# EAGLE board driver (EAGLE 9.6.2)
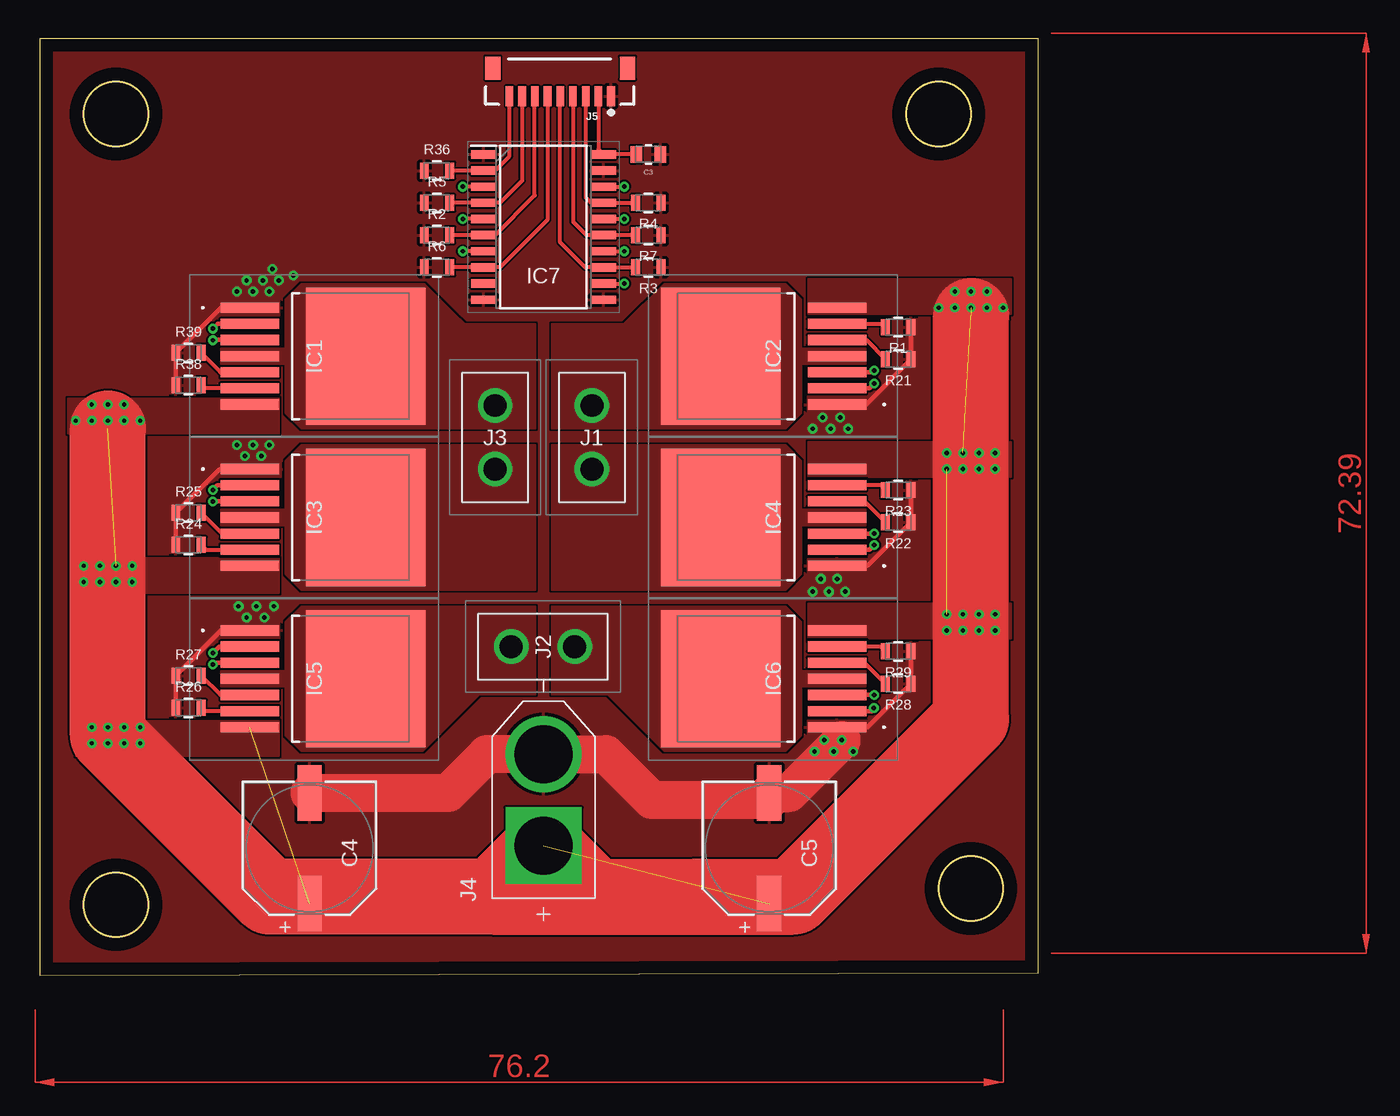
[diagram p0: board, top side]
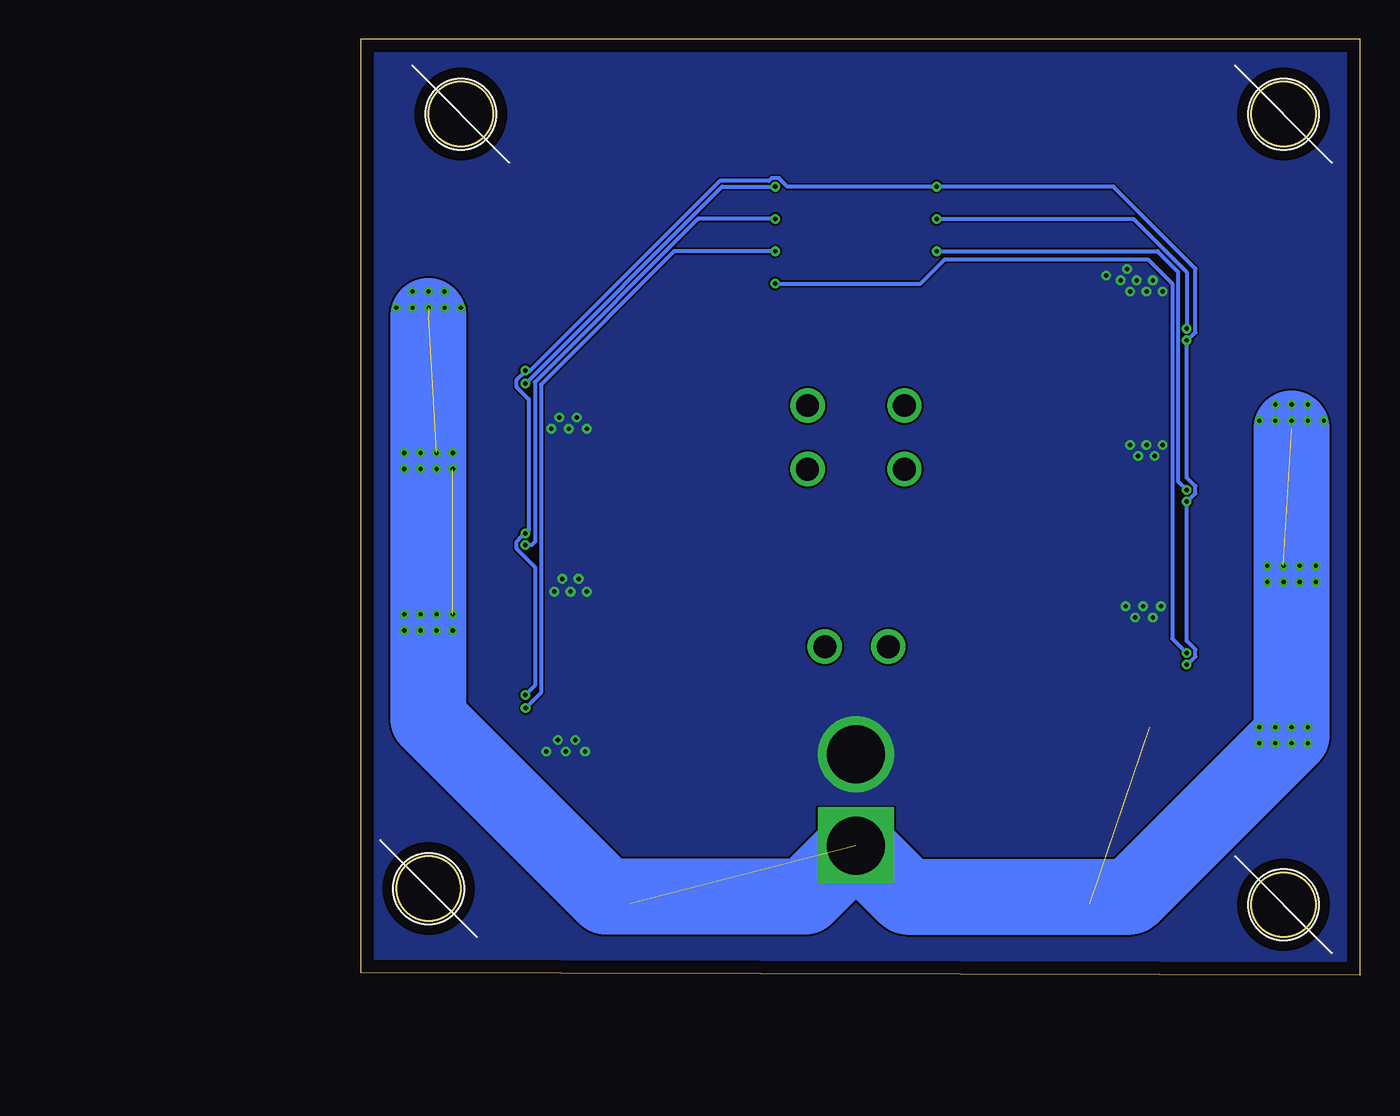
[diagram p1: board, bottom side, seen from below]

Size 78.64 x 73.7 mm. Coordinates in mm from the lower left corner, seen from the top.
Outline: 0,0 78.64,0.2 78.64,73.7 0,73.7 0,0
Outline: circle at 6.01,67.77 radius 2.54
Outline: circle at 70.79,67.77 radius 2.54
Outline: circle at 73.33,6.8 radius 2.54
Outline: circle at 6.01,5.54 radius 2.54
Copper layers (1*16): Top 0.035mm / dielectric 1.5mm / Bottom 0.035mm
Design rules "default": minimum track width 6mil, minimum drill 0.35mm, track to track 6mil, track to pad 6mil, pad to pad 6mil, via to via 6mil, smd to smd 6mil, copper to edge 40mil, drill to drill 6mil, minimum pad ring 10mil, minimum via ring 8mil, stop-mask expansion 4mil, vias tented up to drill 0mil, thermal gap 10mil

## Footprints (pad centres in the part's own frame; a part is rotated, then mirrored left to right if it is on the bottom)
WCAP-CSST_0805 = smd 0.9 x 1.3: 1 -0.95,0; 2 0.95,0
WCAP-AS5H_10X10.5(DXL) = smd 4.4 x 1.9: 1 4.35,0; 2 -4.35,0
BTS7960B = smd 0.8 x 4.6: 1 -3.81,-9.15; 2 -2.54,-9.15; 3 -1.27,-9.15; 4 0,-9.15; 5 1.27,-9.15; 6 2.54,-9.15; 7 3.81,-9.15 | smd 10.8 x 9.4: 8 0,0
SOIC127P1030X265-20N = smd 1.95 x 0.65: 1 -4.725,5.715; 2 -4.725,4.445; 3 -4.725,3.175; 4 -4.725,1.905; 5 -4.725,0.635; 6 -4.725,-0.635; 7 -4.725,-1.905; 8 -4.725,-3.175; 9 -4.725,-4.445; 10 -4.725,-5.715; 11 4.725,-5.715; 12 4.725,-4.445; 13 4.725,-3.175; 14 4.725,-1.905; 15 4.725,-0.635; 16 4.725,0.635; 17 4.725,1.905; 18 4.725,3.175; 19 4.725,4.445; 20 4.725,5.715
XT30PB = drill 1.8 pad 2.7: 1 0,0; 2 0,-5
AMASS_XT60-M = drill 4.55 pad 6: N 3.6,0 | drill 4.55 pad 6 square: P -3.6,0
JST-6-SMD-VERT-1.0MM = smd 0.6 x 1.55: 1 -3.54,1.27; 2 -2.54,1.27; 3 -1.54,1.27; 4 -0.54,1.27; 5 0.46,1.27; 6 1.46,1.27; 7 2.46,1.27; 8 3.46,1.27; 9 4.46,1.27 | smd 1.2 x 1.8: P$1 -4.84,-0.955; P$2 5.76,-0.955
WRIS-KSKE_0805_2.0X1.25X0.6(LXWXH) = smd 0.7 x 1.25: 1 -1,0; 2 1,0

## Placement (x,y rotation side)
C3  100nF  [WCAP-CSST_0805]  47.92,64.59 180 top
C4  330 µF  [WCAP-AS5H_10X10.5(DXL)]  21.25,9.98 270 top
C5  330 µF  [WCAP-AS5H_10X10.5(DXL)]  57.45,9.98 270 top
IC1  BTS7960B  [BTS7960B]  25.7,48.72 270 top
IC2  BTS7960B  [BTS7960B]  53.64,48.72 90 top
IC3  BTS7960B  [BTS7960B]  25.7,36.02 270 top
IC4  BTS7960B  [BTS7960B]  53.64,36.02 90 top
IC5  BTS7960B  [BTS7960B]  25.7,23.32 270 top
IC6  BTS7960B  [BTS7960B]  53.64,23.32 90 top
IC7  SN74AHC244DW  [SOIC127P1030X265-20N]  39.67,58.88 0 top
J1  XT30PB  [XT30PB]  43.48,39.83 180 top
J2  XT30PB  [XT30PB]  37.13,25.86 90 top
J3  XT30PB  [XT30PB]  35.86,39.83 180 top
J4  XT60-M  [AMASS_XT60-M]  39.67,13.79 90 top
J5  JST_6_PIN_VERTICAL  [JST-6-SMD-VERT-1.0MM]  41.45,70.43 180 top
R1  10k  [WRIS-KSKE_0805_2.0X1.25X0.6(LXWXH)]  67.61,51 180 top
R2  10k  [WRIS-KSKE_0805_2.0X1.25X0.6(LXWXH)]  31.29,58.24 0 top
R3  10k  [WRIS-KSKE_0805_2.0X1.25X0.6(LXWXH)]  47.92,55.7 180 top
R4  10k  [WRIS-KSKE_0805_2.0X1.25X0.6(LXWXH)]  47.92,60.78 180 top
R5  10k  [WRIS-KSKE_0805_2.0X1.25X0.6(LXWXH)]  31.29,60.78 0 top
R6  10k  [WRIS-KSKE_0805_2.0X1.25X0.6(LXWXH)]  31.29,55.7 0 top
R7  10k  [WRIS-KSKE_0805_2.0X1.25X0.6(LXWXH)]  47.92,58.24 180 top
R21  10k  [WRIS-KSKE_0805_2.0X1.25X0.6(LXWXH)]  67.61,48.46 180 top
R22  10k  [WRIS-KSKE_0805_2.0X1.25X0.6(LXWXH)]  67.61,35.63 180 top
R23  10k  [WRIS-KSKE_0805_2.0X1.25X0.6(LXWXH)]  67.61,38.17 180 top
R24  10k  [WRIS-KSKE_0805_2.0X1.25X0.6(LXWXH)]  11.73,33.86 0 top
R25  10k  [WRIS-KSKE_0805_2.0X1.25X0.6(LXWXH)]  11.73,36.4 0 top
R26  10k  [WRIS-KSKE_0805_2.0X1.25X0.6(LXWXH)]  11.73,21.03 0 top
R27  10k  [WRIS-KSKE_0805_2.0X1.25X0.6(LXWXH)]  11.73,23.57 0 top
R28  10k  [WRIS-KSKE_0805_2.0X1.25X0.6(LXWXH)]  67.61,22.93 180 top
R29  10k  [WRIS-KSKE_0805_2.0X1.25X0.6(LXWXH)]  67.61,25.47 180 top
R36  10k  [WRIS-KSKE_0805_2.0X1.25X0.6(LXWXH)]  31.29,63.32 0 top
R38  10k  [WRIS-KSKE_0805_2.0X1.25X0.6(LXWXH)]  11.73,46.43 0 top
R39  10k  [WRIS-KSKE_0805_2.0X1.25X0.6(LXWXH)]  11.73,48.97 0 top

## Library data of the parts
C3 = Wurth_Capacitors_WCAP-CSST; CERAMIC-TYPE: X7R Class II; DATASHEET-URL: https://www.we-online.com/catalog/datasheet/885382207007.pdf; DF: 2.50%; H: 1.25mm; OPERATING-TEMPERATURE: -55 / +125°C; PART-NUMBER: 885382207007; RISO: 5GOhm; TECHNICAL-REFERENCE: X7R0805104K050DFCT1S000; TOL-C: +/- 10%; VR: 50V(DC)
C4 C5 = Wurth_Capacitors_WCAP-AS5H; DATASHEET-URL: https://www.we-online.com/catalog/datasheet/865230457008.pdf; DF: 16%; DIAMETER: 10mm; I-LEAK: 82.5uA; I-RIPPLE: 375mA; L: 10.5mm; OPERATING-TEMPERATURE: -40 °C up to +105 °C; PART-NUMBER: 865230457008; TECHNICAL-REFERENCE: ASDF105331M025DVCTEE000; VR: 25V(DC); Z: 0.0956527Ohm
IC1-IC6 = BTS7960B; DESCRIPTION: Path resistance of typ. 16 m @ 25 C; HEIGHT: 4.4mm; MANUFACTURER_NAME: Rochester Electronics; MANUFACTURER_PART_NUMBER: BTS7960B
IC7 = SN74AHC244DW; ARROW_PART_NUMBER: SN74AHC244DW; ARROW_PRICE-STOCK: https://www.arrow.com/en/products/sn74ahc244dw/texas-instruments?region=nac; DESCRIPTION: SN74AHC244DW, Octal Bus Buffer, AHC, 11.9 @ 3.3 Vns, 8mA 2 to 5.5V 20-Pin SOIC; HEIGHT: 2.65mm; MANUFACTURER_NAME: Texas Instruments; MANUFACTURER_PART_NUMBER: SN74AHC244DW; MOUSER_PART_NUMBER: 595-SN74AHC244DW; MOUSER_PRICE-STOCK: https://www.mouser.co.uk/ProductDetail/Texas-Instruments/SN74AHC244DW?qs=j%2FZo4ajzVJKtLyxm%252BX3lew%3D%3D
J1-J3 = XT30PB; DESCRIPTION: Mini XT60 XT30 Connector for RC Multirotor Racing Drone Quadcopter; HEIGHT: 10.7mm; MANUFACTURER_NAME: Amass; MANUFACTURER_PART_NUMBER: XT30PB
J4 = XT60-M; AVAILABILITY: Not in stock; DESCRIPTION: Plug; DC supply; XT60; male; PIN: 2; for cable; soldered; 30A; 500V; MF: AMASS; MP: XT60-M; PACKAGE: Package; PRICE: None
J5 = SparkFun-Connectors_JST_SH; PROD_ID: CONN-08249; SF_ID: GPS-00579
R1-R7 R21-R29 R36 R38 R39 = Wurth_Resistor_WRIS-KSKE; DATASHEET-URL: https://katalog.we-online.de/pbs/datasheet/560050320001.pdf; IR: 1.81A; MOUNT: SMT; PART-NUMBER: 560050320001; PRATED: 0.33W; TCR: 250ppm/ °C; TECHNICAL-REFERENCE: KE0805R100F103LAATP0000

## Nets
GND: C3.1 C4.2 C5.2 IC1.1 IC2.1 IC3.1 IC4.1 IC5.1 IC6.1 IC7.1 IC7.10 IC7.11 IC7.19 J4.N J5.1 R1.1 R2.1 R3.1 R4.1 R5.1 R6.1 R7.1 R21.1 R22.1 R23.1 R24.1 R25.1 R26.1 R27.1 R28.1 R29.1 R36.1 R38.1 R39.1
I1: IC7.2 J5.9 R36.2
I2: IC7.4 J5.8 R5.2
I3: IC7.6 J5.7 R2.2
I4: IC7.8 J5.6 R6.2
I5: IC7.13 J5.5 R3.2
I6: IC7.15 J5.4 R7.2
IEN: IC7.17 J5.3 R4.2
N$1: IC2.6 R1.2
N$2: IC1.6 R38.2
N$3: IC1.5 R39.2
N$4: IC2.5 R21.2
N$5: IC3.6 R24.2
N$6: IC3.5 R25.2
N$7: IC4.6 R23.2
N$8: IC4.5 R22.2
N$9: IC5.6 R26.2
N$10: IC5.5 R27.2
N$11: IC6.6 R29.2
N$12: IC6.5 R28.2
OUT1: IC2.4 IC2.8 J1.2
OUT2: IC4.4 IC4.8 J1.1
OUT3: IC6.4 IC6.8 J2.2
OUT4: IC5.4 IC5.8 J2.1
OUT5: IC3.4 IC3.8 J3.1
OUT6: IC1.4 IC1.8 J3.2
S1: IC2.2 IC7.18
S2: IC4.2 IC7.16
S3: IC6.2 IC7.14
S4: IC5.2 IC7.12
S5: IC3.2 IC7.7
S6: IC1.2 IC7.5
SEN: IC1.3 IC2.3 IC3.3 IC4.3 IC5.3 IC6.3 IC7.3
VCC: C3.2 IC7.20 J5.2
VS: C4.1 C5.1 IC1.7 IC2.7 IC3.7 IC4.7 IC5.7 IC6.7 J4.P

## Tracks (layer width: path | path; a pad name or v marks a point on that pad's centre or on a via)
GND  (via drill 0.35)
  Top 0.305: IC4.1 63.16,32.2
  Top 0.35: R23.1 R22.1 65.18,32.2 63.16,32.2 | R29.1 R28.1 65.18,19.5 IC6.1 | R24.1 R25.1 14.16,39.83 IC3.1 | IC1.1 14.29,52.53 R39.1 R38.1 | R26.1 R27.1 14.29,27.13 IC5.1 16.81,27.13 | R1.1 R21.1 65.05,44.91 IC2.1
  Top 3: C4.2 32.16,14.33 35.22,17.39 J4.N 44.59,17.39 48.19,13.79 57.45,13.79 | C5.2 59.01,14.33 v63.16,18.49
  other vias: 19.98,55.06 18.33,55.57 18.84,54.68 18.08,53.8 17.57,54.68 16.81,53.8 16.3,54.68 15.54,53.8 15.54,41.73 16.81,41.73 16.17,40.84 17.45,40.84 18.08,41.73 15.67,29.03 16.3,28.14 17.06,29.03 17.7,28.14 18.46,29.03 60.88,43 62.28,43 61.64,43.89 63.04,43.89 63.67,43 60.88,30.17 62.15,30.17 63.42,30.17 62.78,31.19 61.51,31.19 61.01,17.6 61.77,18.49 62.53,17.6 64.05,17.6
  pour Top (no thermals): 18.84,26.49 13.76,26.49 11.1,23.82 11.1,20.39 9.95,20.39 9.95,25.09 14.27,29.41 18.84,29.41
  pour Top (no thermals): 18.97,39.19 13.89,39.19 11.22,36.52 11.22,33.22 10.08,33.22 10.08,37.79 14.4,42.11 18.97,42.11
  pour Top (no thermals): 60.5,32.71 65.58,32.71 68.25,35.38 68.25,38.81 69.39,38.81 69.39,34.11 65.07,29.79 60.5,29.79
  pour Top (no thermals): 60.5,20.01 65.58,20.01 68.25,22.68 68.25,26.11 69.39,26.11 69.39,21.41 65.07,17.09 60.5,17.09
  pour Top (no thermals): 18.84,51.89 13.76,51.89 11.1,49.22 11.1,45.79 9.95,45.79 9.95,50.49 14.27,54.81 18.84,54.81
  pour Top (rank 2): -0.34,-0.56 78.79,-0.56 78.79,74.12 -0.34,74.12
  pour Top (no thermals): 60.5,45.54 65.58,45.54 68.25,48.21 68.25,51.64 69.39,51.64 69.39,46.94 65.07,42.62 60.5,42.62
  pour Bottom (no thermals): 79.17,74.37 -0.72,74.37 -0.72,-1.07 79.17,-1.07
I1
  Top 0.305: J5.9 36.99,64.45 35.86,63.32 IC7.2 R36.2
I2
  Top 0.305: J5.8 37.99,62.53 36.24,60.78 IC7.4 R5.2
I3
  Top 0.305: J5.7 38.99,61.37 35.86,58.24 IC7.6 R2.2
I4
  Top 0.305: J5.6 39.99,59.45 36.24,55.7 IC7.8 R6.2
I5
  Top 0.305: J5.5 40.99,57.67 42.95,55.7 IC7.13 R3.2
I6
  Top 0.305: J5.4 42,69.15 42,59.28 43.04,58.24 IC7.15 R7.2
IEN
  Top 0.305: J5.3 42.99,61.22 43.43,60.78 IC7.17 R4.2
N$1
  Top 0.305: IC2.6 66.36,51.25 R1.2
N$2
  Top 0.305: IC1.6 12.98,46.17 R38.2
N$3
  Top 0.305: IC1.5 14.25,47.45 R39.2
N$4
  Top 0.305: IC2.5 65.09,49.98 R21.2
N$5
  Top 0.305: R24.2 13.11,33.47 IC3.6
N$6
  Top 0.305: IC3.5 14.38,34.75 R25.2
N$7
  Top 0.305: IC4.6 66.23,38.56 R23.2
N$8
  Top 0.305: IC4.5 64.96,37.28 R22.2
N$9
  Top 0.305: IC5.6 12.98,20.78 R26.2
N$10
  Top 0.305: IC5.5 14.25,22.05 R27.2
N$11
  Top 0.305: R29.2 66.23,25.86 IC6.6
N$12
  Top 0.305: IC6.5 64.96,24.59 R28.2
OUT1
  pour Top (no thermals): 46.02,51.25 40.3,51.25 40.3,43 58.72,43 59.99,44.27 59.99,48.08 65.07,48.08 65.07,49.35 59.99,49.35 59.99,53.16 58.72,54.43 49.2,54.43
OUT2
  pour Top (no thermals): 40.3,41.73 40.3,30.3 58.72,30.3 59.99,31.57 59.99,35.38 65.07,35.38 65.07,36.65 59.99,36.65 59.99,40.46 58.72,41.73
OUT3
  pour Top (no thermals): 40.3,29.03 40.3,22.05 44.75,22.05 49.2,17.6 58.72,17.6 59.99,18.87 59.99,22.68 65.07,22.68 65.07,23.95 59.99,23.95 59.99,27.76 58.72,29.03
OUT4
  pour Top (no thermals): 39.03,29.03 20.62,29.03 19.35,27.76 19.35,23.95 14.27,23.95 14.27,22.68 19.35,22.68 19.35,18.87 20.62,17.6 30.14,17.6 34.59,22.05 39.03,22.05
OUT5
  pour Top (no thermals): 39.03,30.3 39.03,41.73 20.62,41.73 19.35,40.46 19.35,36.65 14.27,36.65 14.27,35.38 19.35,35.38 19.35,31.57 20.62,30.3
OUT6
  pour Top (no thermals): 39.03,43 39.03,51.25 33.45,51.25 32.68,52.02 30.27,54.43 20.62,54.43 19.35,53.16 19.35,49.35 14.27,49.35 14.27,48.08 19.35,48.08 19.35,44.27 20.62,43
S1  (via drill 0.35)
  Top 0.305: IC7.18 v46.02,62.05
  Top 0.35: IC2.2 65.32,46.17 v65.7,46.56
  Bottom 0.305: v65.7,46.56 50.21,62.05 v46.02,62.05
S2  (via drill 0.35)
  Top 0.305: IC7.16 v46.02,59.51
  Top 0.35: IC4.2 65.34,33.47 v65.7,33.84
  Bottom 0.305: v46.02,59.51 52.1,59.51 64.94,46.67 64.94,34.11 65.22,33.84 v65.7,33.84
S3  (via drill 0.35)
  Top 0.305: IC7.14 v46.02,56.97
  Top 0.35: IC6.2 65.58,20.78 65.69,20.88 v65.69,21.01
  Bottom 0.305: v46.02,56.97 54,56.97 64.49,46.48 64.49,22.21 v65.69,21.01
S4  (via drill 0.35)
  Top 0.305: IC7.12 v46.02,54.43
  Top 0.35: IC5.2 14.14,25.86 v13.63,25.35
  Bottom 0.305: v46.02,54.43 34.59,54.43 32.68,56.33 16.68,56.33 14.78,54.43 14.78,26.49 v13.63,25.35
S5  (via drill 0.35)
  Top 0.305: IC7.7 v33.32,56.97
  Top 0.35: IC3.2 14,38.56 v13.63,38.19
  Bottom 0.305: v33.32,56.97 15.93,56.97 14.32,55.36 14.32,38.88 v13.63,38.19
S6  (via drill 0.35)
  Top 0.305: IC7.5 v33.32,59.51 | 14.02,51.25 v13.63,50.87
  Top 0.35: IC1.2 14.27,51.25 14.02,51.25
  Bottom 0.305: v33.32,59.51 17.83,59.51 13.63,55.32 v13.63,50.87
SEN  (via drill 0.35)
  Top 0.305: IC7.3 v33.32,62.05
  Top 0.35: IC6.3 v65.7,22.05 | IC3.3 v13.63,37.28 | IC4.3 v65.7,34.75 | IC1.3 13.65,49.98 v13.63,49.97 | IC5.3 13.78,24.59 v13.63,24.44 | IC2.3 65.58,47.45 v65.7,47.57
  Bottom 0.305: v65.7,22.05 64.94,22.81 64.94,32.11 66.39,33.55 66.39,34.12 65.99,34.52 65.93,34.52 v65.7,34.75 65.45,35 65.45,45.34 66.39,46.27 66.39,46.84 65.7,47.52 | 65.7,47.52 v65.7,47.57 | v13.63,24.44 13.41,24.66 13.35,24.66 12.95,25.06 12.95,25.63 13.63,26.31 v13.63,37.28 13.41,37.51 13.35,37.51 12.95,37.91 12.95,38.48 13.63,39.16 v13.63,49.97 13.41,50.19 13.35,50.19 12.95,50.59 12.95,55.6 19.4,62.05 v33.32,62.05 45.05,62.05 45.74,62.73 46.3,62.73 46.53,62.51 50.4,62.51 65.39,47.52 65.7,47.52
VCC
  Top 0.305: C3.2 IC7.20 43.99,65 J5.2
VS  (via drill 0.33)  (6 unrouted)
  Top 6: 35.65,6.17 J4.P 43.69,6.17 | 5.38,43 v5.38,19.5 5.38,18.87 18.08,6.17 25.7,6.17 35.65,6.17 | 43.69,6.17 51.73,6.17 59.35,6.17 73.33,20.14 73.33,51.89 | 35.65,6.17 43.69,6.17
  Bottom 6: 5.38,43 v5.38,19.5 5.38,18.87 18.08,6.17 35.65,6.17 J4.P 43.69,6.17 59.35,6.17 73.33,20.14 73.33,51.89
  other vias: 75.23,28.39 75.23,27.13 73.96,27.13 73.96,28.39 72.69,28.39 72.69,27.13 71.42,28.39 71.42,27.13 75.23,39.83 75.23,41.09 73.96,41.09 73.96,39.83 72.69,41.09 71.42,41.09 71.42,39.83 70.79,52.53 72.06,52.53 73.33,52.53 74.59,52.53 74.59,53.8 73.33,53.8 72.06,53.8 4.11,44.91 5.38,44.91 6.65,44.91 7.92,43.64 6.65,43.64 5.38,43.64 4.11,43.64 2.84,43.64 3.47,32.2 3.47,30.93 4.74,30.93 4.74,32.2 6.01,32.2 6.01,30.93 7.28,32.2 7.28,30.93 4.11,19.5 4.11,18.23 5.38,18.23 6.65,19.5 6.65,18.23 7.92,19.5 7.92,18.23 75.87,52.53 72.69,39.83
  pour Top (isolate 0.254, no thermals): 60.5,26.49 60.5,29.28 76.5,29.28 76.5,26.49
  pour Top (isolate 0.254, no thermals): 60.5,39.19 60.5,41.98 76.5,41.98 76.5,39.19
  pour Top (isolate 0.254, no thermals): 18.84,32.84 18.84,30.05 2.84,30.05 2.84,32.84
  pour Top (isolate 0.254, no thermals): 2.21,42.62 2.21,45.41 18.84,45.41 18.84,42.62
  pour Top (isolate 0.254, no thermals): 2.84,17.22 2.84,20.01 18.84,20.01 18.84,17.22
  pour Top (isolate 0.254, no thermals): 76.5,54.81 76.5,52.02 60.5,52.02 60.5,54.81
(copper drawn outside any net)
  shapes: Top area x2